# Altium PCB Group9Hat.PcbDoc (part 1 of 2)
Units mm, origin at the board's own origin, x right, y up, seen from the top; angles counter-clockwise.
Board outline 64 x 85 mm, 4 copper layers (Top Side, Ground Plane, Power Plane, Bottom Side), stack 0.844 mm thick; 100 components, 66 nets, 332 pads, 118 vias.
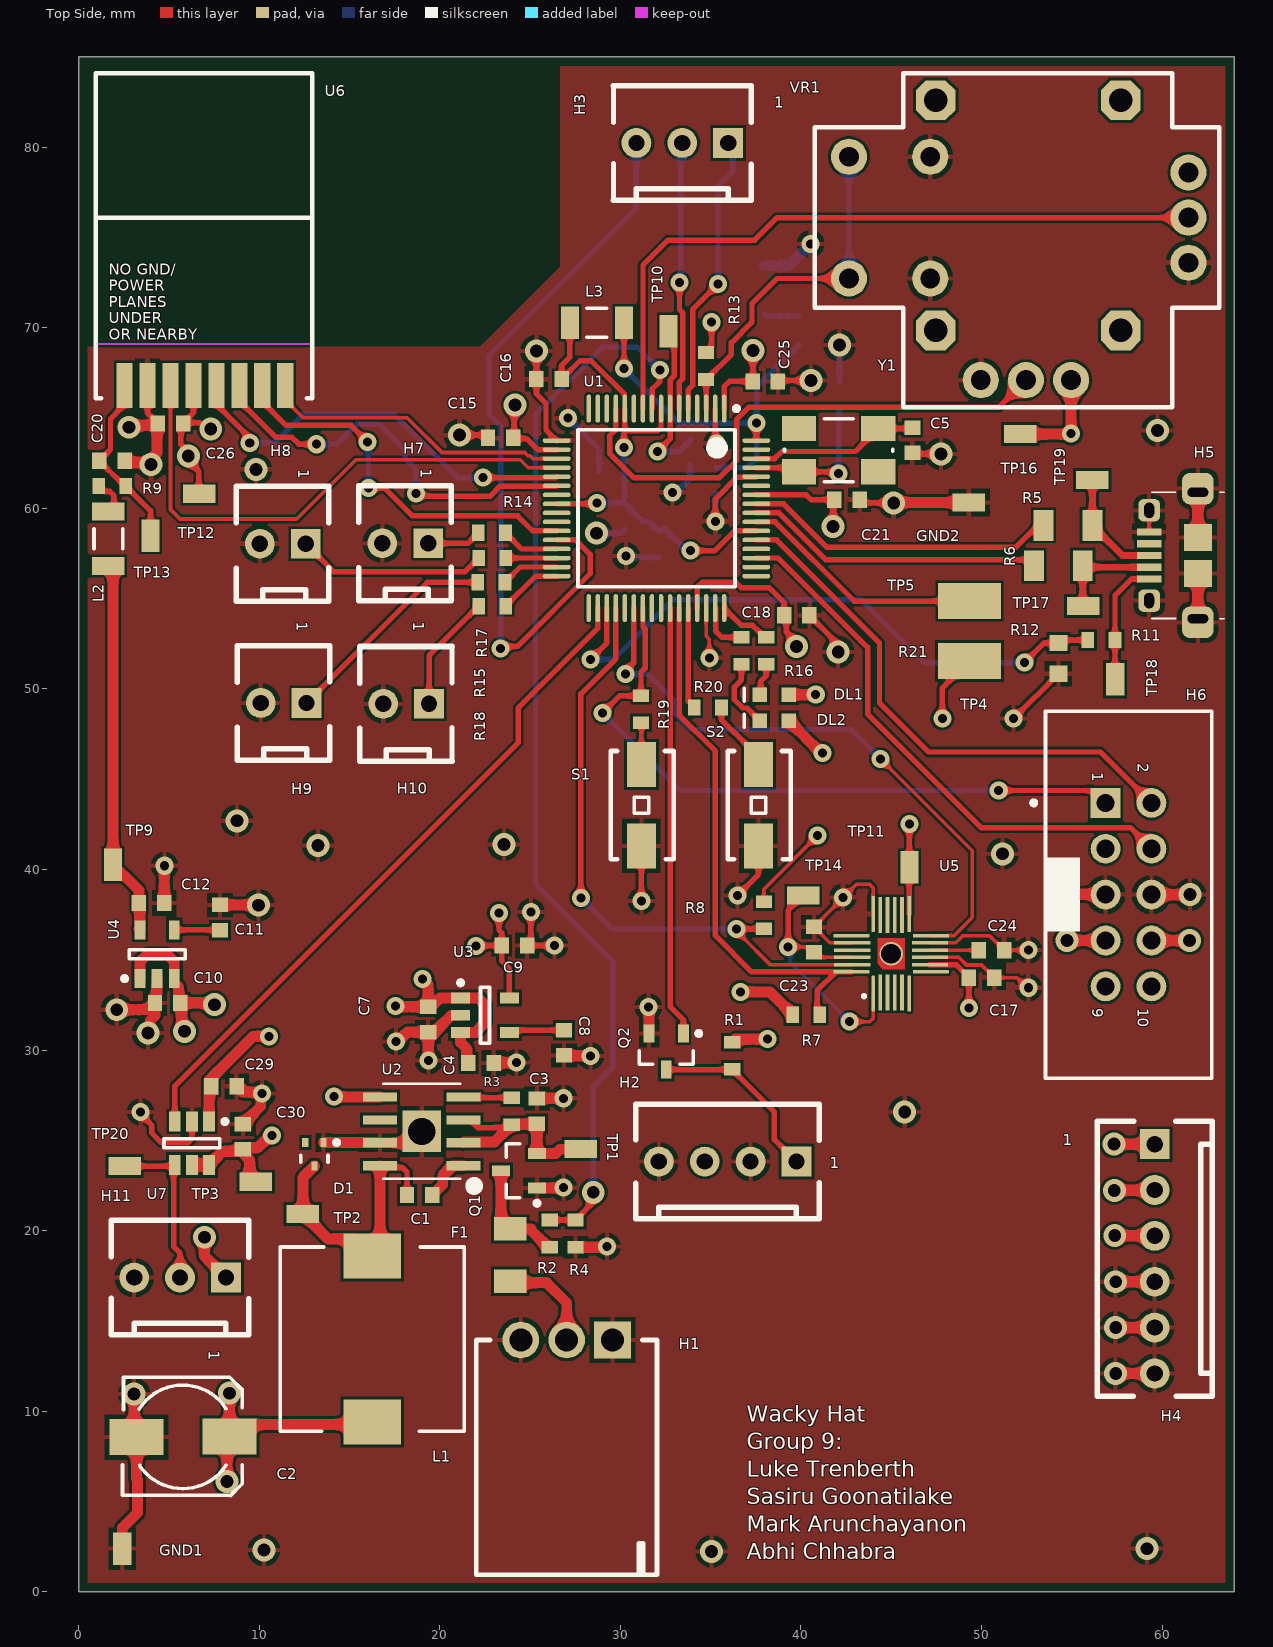
[diagram p0: Top Side view]
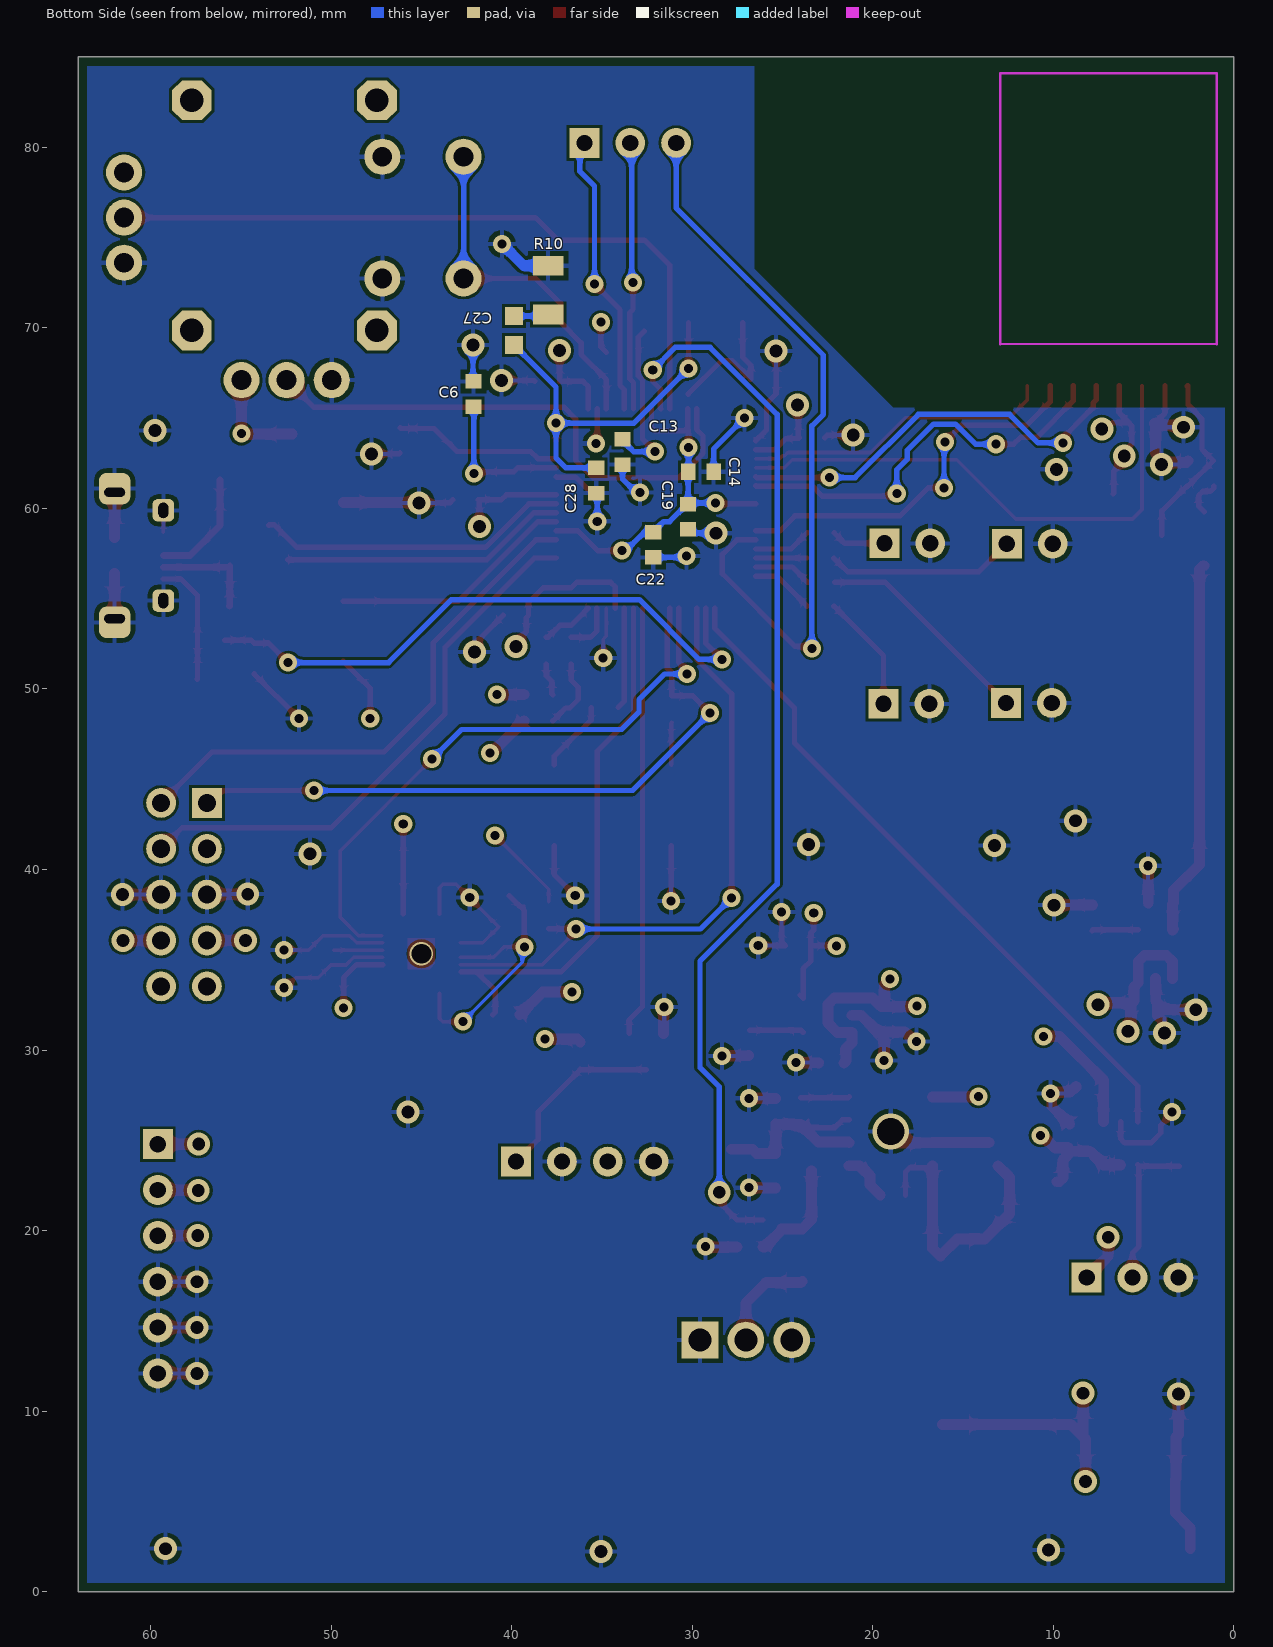
[diagram p1: Bottom Side view, seen from below]
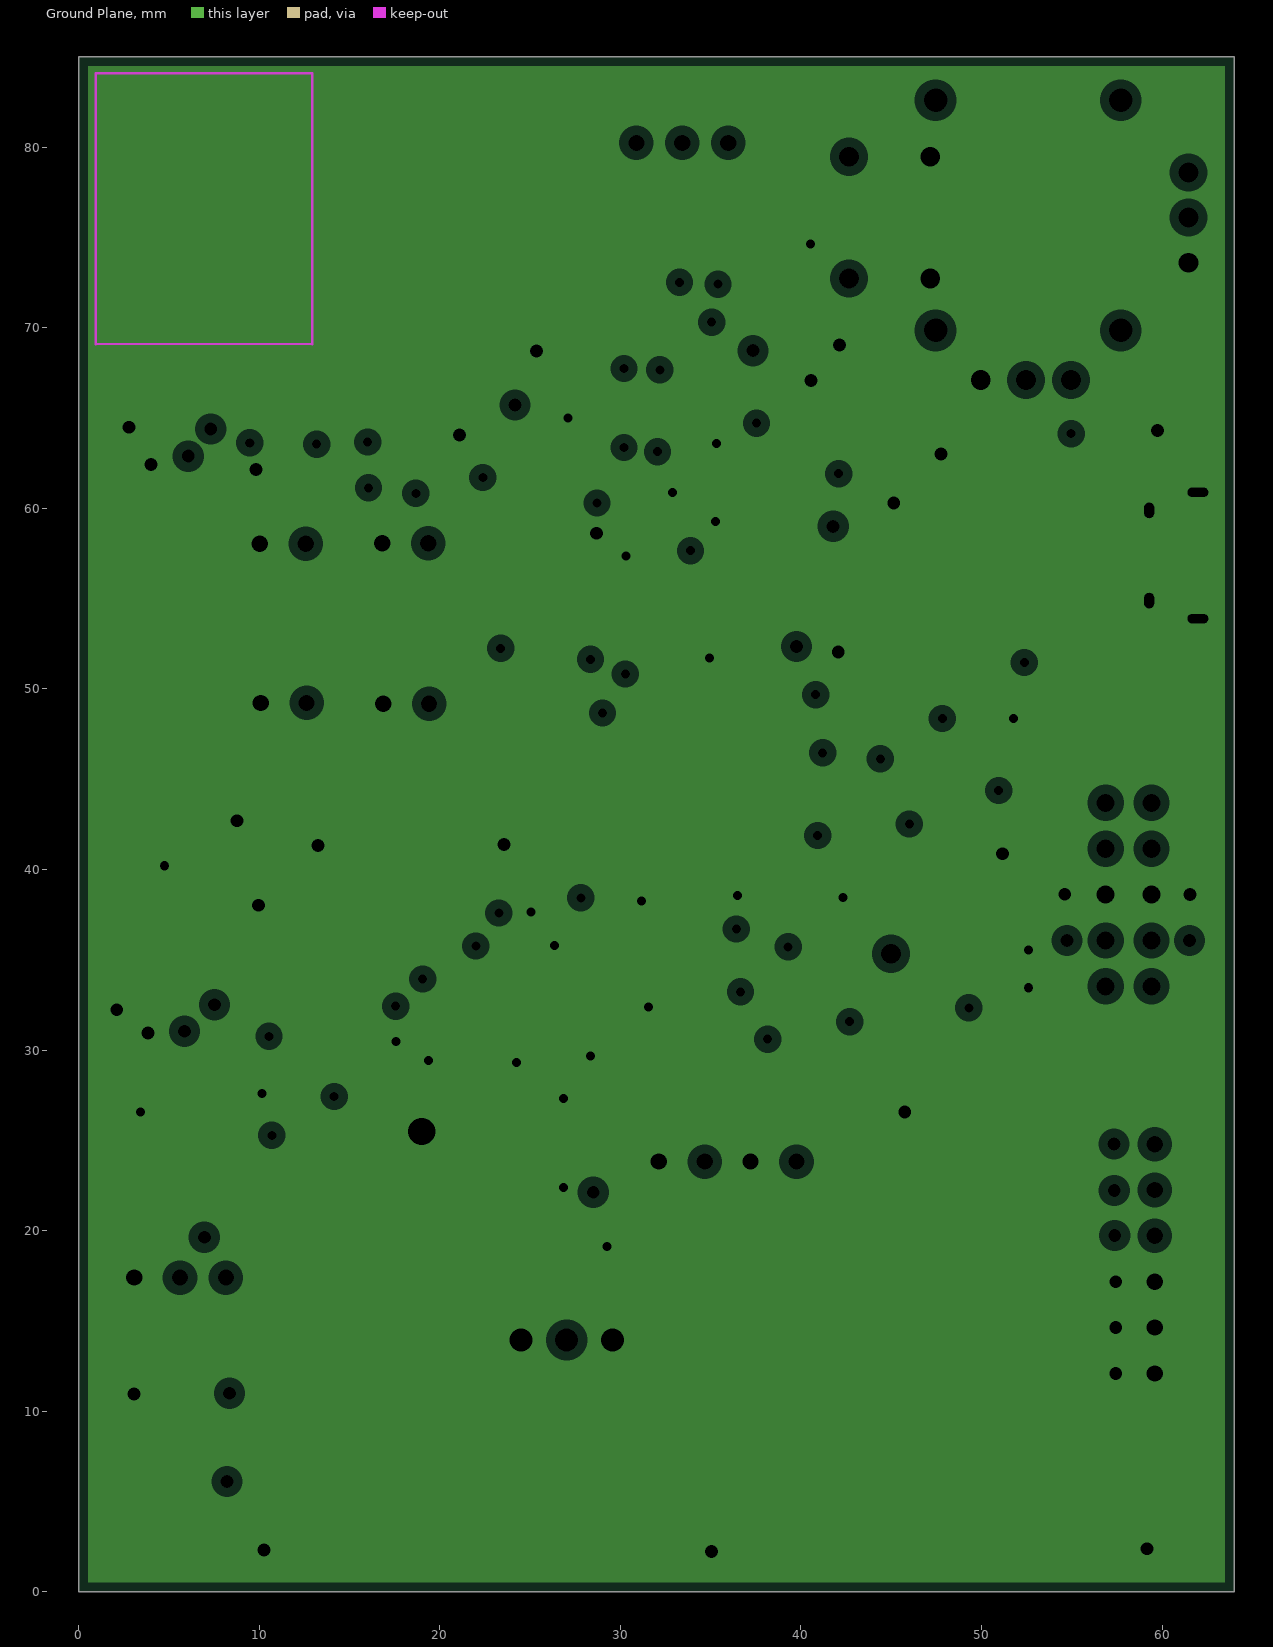
[diagram p2: Ground Plane, clearances drawn from the general rule]
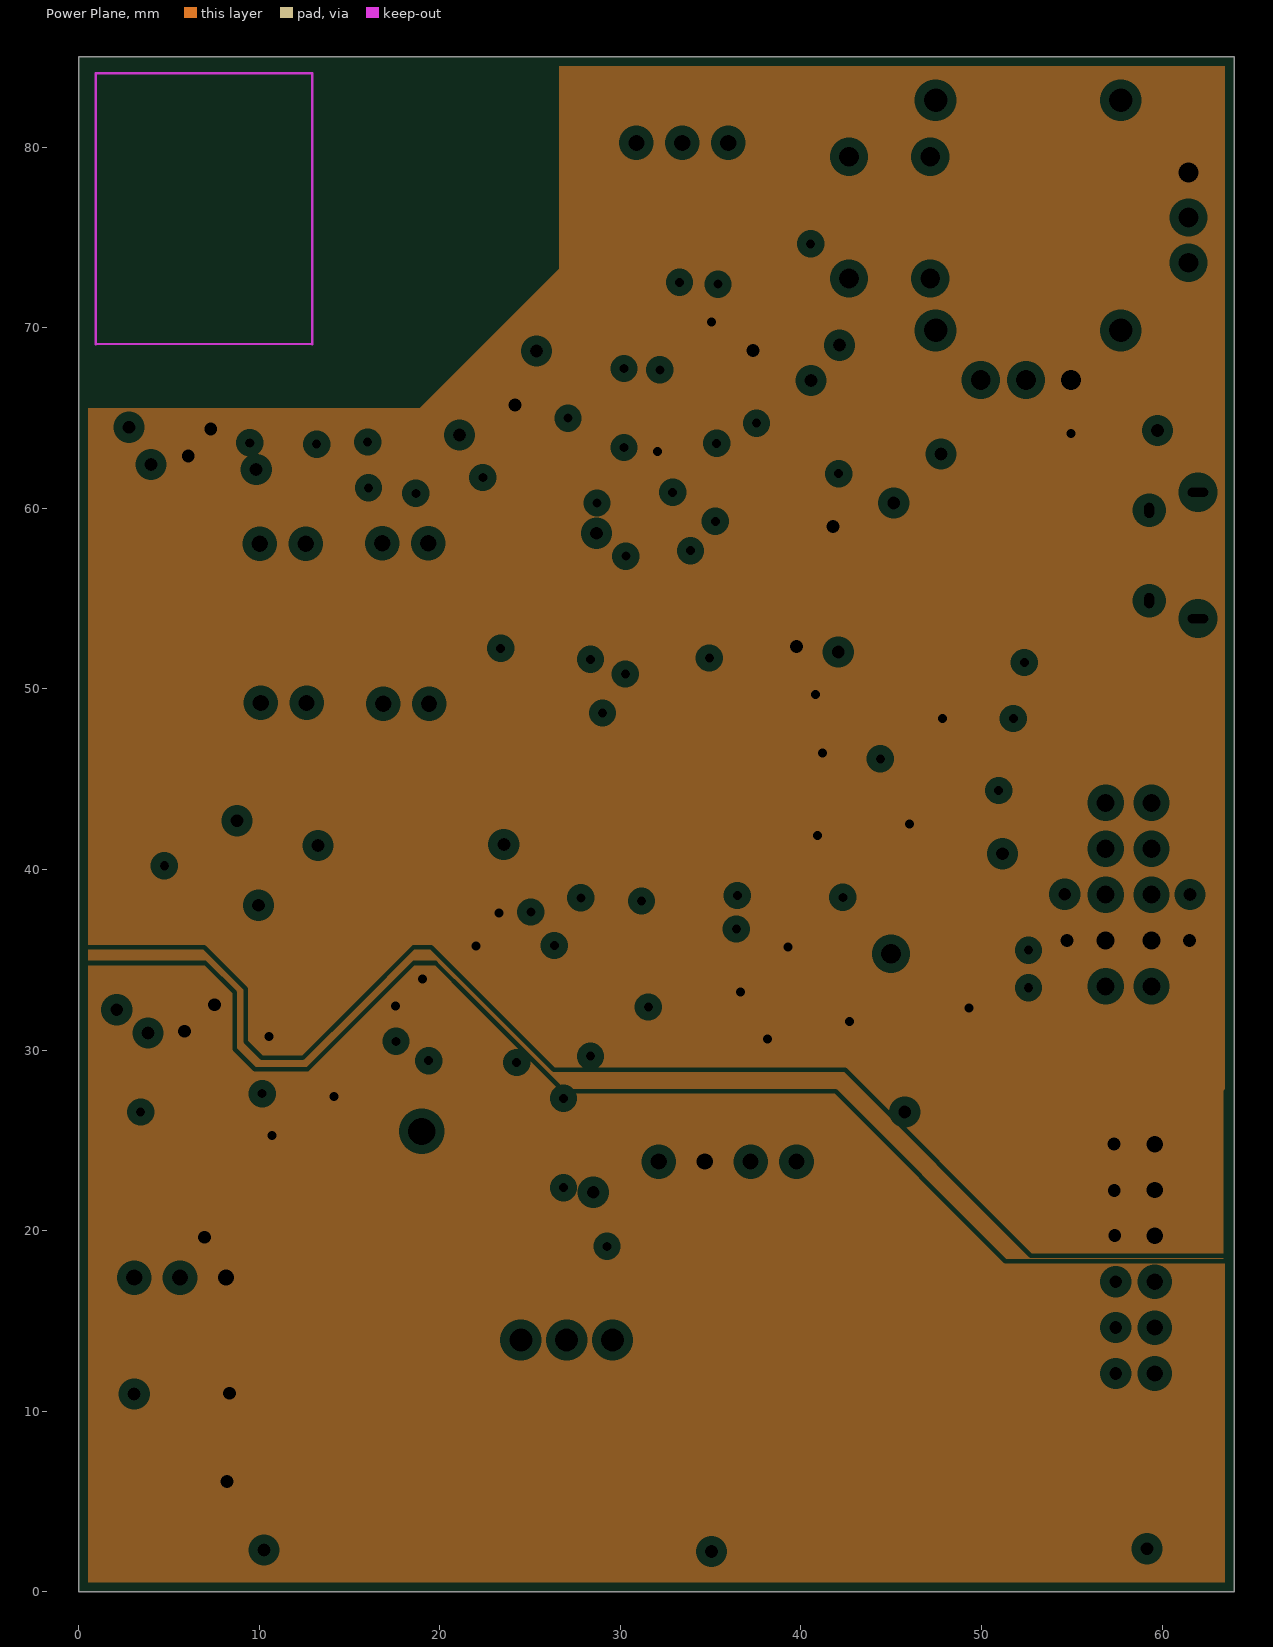
[diagram p3: Power Plane, clearances drawn from the general rule]

## Layer stack, top to bottom
Top Solder: solder mask 0.0102, Solder Resist, Dk 3.5
Top Side: signal copper 0.0356
Dielectric 1: core 0.32, FR-4, Dk 4.8
Ground Plane: plane copper 0.036, net GND
Dielectric 3: prepreg 0.127, Dk 4.2
Power Plane: plane copper 0.036, net (Multiple Nets)
Dielectric 4: core 0.254, Dk 4.2
Bottom Side: signal copper 0.0356
Bottom Solder: solder mask 0.0102, Solder Resist, Dk 3.5

## Board outline
0,85 64,85 64,0 0,0 0,85

## Design rules (kind name [scope] priority, off if disabled: settings)
BoardOutlineClearance [All] p1: gap=0.5 ignorepadtopadclearanceinfootprint=FALSE
Clearance Min_Clearance_Circuit_Labs [All] p1: gap=0.15 ignorepadtopadclearanceinfootprint=FALSE except(0: Arc-Hole Track-Hole SMDPad-Hole THPad-Hole Via-Hole Fill-Hole Poly-Hole Region-Hole Text-Hole)
DiffPairsRouting [All] p1: maxlimit=0.254 minlimit=0.254 mostfreqgap=0.254 toplayer_minwidth=0.381 toplayer_maxwidth=0.381 toplayer_prefwidth=0.381 bottomlayer_minwidth=0.381 bottomlayer_maxwidth=0.381 bottomlayer_prefwidth=0.381 maxuncoupledlength=12.7
FanoutControl Fanout_BGA [IsBGA] p1 off: bgadir=Out bgaviamode=Centered fanoutstyle=Auto fanoutdirection=Alternating viagrid=0.025 // Fanout_BGA (Default Rule)
HoleSize [All] p1: absolutevalues=TRUE maxlimit=10 minlimit=0.3 maxpercent=80.000 minpercent=20.000
MinimumAnnularRing [All] p1: minimumring=0.1
MinimumSolderMaskSliver [All] p1: minsoldermaskwidth=0.1
NetAntennae [All] p1: netantennaetolerance=1
PasteMaskExpansion [All] p1 off: expansion=0.2
PlaneClearance [All] p1: clearance=0.508
PlaneConnect [All] p1: planeconnectstyle=Relief reliefexpansion=0.508 reliefentries=4 reliefconductorwidth=0.254 reliefairgap=0.254
PolygonConnect [All] p1: connectstyle=Relief reliefconductorwidth=0.254 reliefentries=4 polygonreliefangle="90 Angle" airgapwidth=0.254
RoutingVias [All] p1: holewidth=0.5 width=1 viastyle="Through Hole" minholewidth=0.3 minwidth=0.6 maxholewidth=1 maxwidth=2
SMDNeckDown [All] p1 off: percent=50.000
SMDToCorner [All] p1: distance=98425
SMDToPlane [All] p1: distance=1968504
SilkToSolderMaskClearance SilkscreenOverComponentPads [IsPad] p1: minsilkscreentomaskgap=0.254 clearancetoexposedcopper=TRUE
SolderMaskExpansion [All] p1: expansion=0.102
ViasUnderSMD [All] p1: allowed=FALSE
Width [All] p1: maxlimit=2 minlimit=0.15 preferedwidth=0.3
21 further rules are at their usual default settings.

## Classes and differential pairs
differential pair D: +D_P -D_N

## Components (designator, comment, footprint, x,y, rotation, side; value= is the part's Value field where it differs from the comment)
C1 "100nF" CAPC1608L 18.883,21.971 r0 top
C2 "100uF/16V" NICH-1 5.766,8.585 r0 top
C3 "10uF" CAPC1608L 25.375,26.619 r270 top
C4 "100nF" CAPC1608L 22.287,29.286 r180 top
C5 "27pF" CAPC1608L 46.177,63.768 r90 top
C6 "27pF" CAPC1608L 42.113,66.331 r270 bottom
C7 "1uF" CAPC1608L 19.355,31.699 r90 top
C8 "10nF" CAPC1608L 26.873,30.404 r90 top
C9 "1uF" CAPC1608L 24.13,35.789 r180 top
C10 "1uF" CAPC1608L 4.928,32.614 r0 top
C11 "10nF" CAPC1608L 7.823,37.338 r270 top
C12 "1uF" CAPC1608L 4.039,38.151 r180 top
C13 "100nF" CAPC1608L 33.858,63.119 r270 bottom
C14 "100nF" CAPC1608L 29.515,62.027 r0 bottom
C15 "100nF" CAPC1608L 23.368,63.906 r180 top
C16 "100nF" CAPC1608L 26.049,67.158 r0 top
C17 "100nF" CAPC1608L 50.001,34.011 r180 top
C18 "100nF" CAPC1608L 39.765,54.077 r0 top
C19 "100nF" CAPC1608L 30.226,59.538 r90 bottom
C20 "10uF" CAPC1608L 1.84,62.636 r180 top
C21 "100nF" CAPC1608L 42.545,60.477 r0 top
C22 "100nF" CAPC1608L 32.156,57.988 r90 bottom
C23 "10nF" CAPC1608L 40.716,36.119 r270 top
C24 "100nF" CAPC1608L 50.546,35.535 r180 top
C25 "100nF" CAPC1608L 38.024,67.031 r0 top
C26 "10nF" CAPC1608L 5.091,64.694 r0 top
C27 "4.7uF" CAPC1608N 39.878,69.85 r270 bottom
C28 "100nF" CAPC1608L 35.312,61.544 r270 bottom
C29 "100nF" CAPC1608L 8.052,27.991 r0 top
C30 "100nF" CAPC1608L 9.093,25.197 r90 top
D1 "BAS16TT1G" SOT416 13.056,24.232 r180 top
DL1 "Yellow" WL-SMCW0603 37.719,49.682 r0 top
DL2 "Bright Green" WL-SMCW0603 37.719,48.235 r0 top
F1 "5A" RESC3216N 23.901,18.644 r90 top
GND1 "TP_0603" TP_0603 2.413,2.388 r90 top
GND2 "TP_0603" TP_0603 49.301,60.325 r180 top
H1 "Battery_HEADER_3pin" BATT_HEADER_3POS 27.026,13.945 r180 top
H2 "SMD Vert 1.25mm" MOLEX_KK_4_HDR 39.751,23.825 r180 top value="4 Pin Molex KK Hdr"
H3 "3 Pin Molex KK Hdr" MOLEX_KK_3_HDR 35.966,80.239 r180 top
H4 "SMD Vert 1.25mm" MOLEX_KK_6_HDR 59.588,24.79 r270 top value="6 Pin Molex KK Hdr"
H5 "JS_USB_MICRO_B" FCI_USB_10118194-0001LF 63.434,57.389 r90 top
H6 "Header 5X2 Vert" IDC2.54-V10D 58.141,38.608 r270 top
H7 "SMD Vert 1.25mm" MOLEX_KK_2_HDR 19.355,58.064 r180 top value="2 Pin Molex KK HDR"
H8 "SMD Vert 1.25mm" MOLEX_KK_2_HDR 12.573,58.039 r180 top value="2 Pin Molex KK HDR"
H9 "SMD Vert 1.25mm" MOLEX_KK_2_HDR 12.624,49.225 r180 top value="2 Pin Molex KK HDR"
H10 "SMD Vert 1.25mm" MOLEX_KK_2_HDR 19.406,49.174 r180 top value="2 Pin Molex KK HDR"
H11 "SMD Vert 1.25mm" MOLEX_KK_3_HDR 8.153,17.399 r180 top value="3 Pin Molex KK Hdr"
L1 "IND 5.2UH 6A" INDUCTOR5u2 16.256,13.995 r270 top
L2 "1A max, Idc 0.3R," INDC3216L 1.651,58.318 r270 top
L3 "1A max, Idc 0.3R," INDC3216L 28.701,70.282 r180 top
Q1 "SSM3J328R,LF" SOT23_L 24.384,23.317 r180 top
Q2 "SSM3J328R,LF" SOT23_L 32.537,29.921 r270 top
R1 "1K" RESC1608L 36.195,29.693 r90 top
R2 "220K" RESC1608L 26.086,19.837 r270 top
R3 "100K" RESC1608L 23.978,26.619 r270 top
R4 "220K" RESC1608L 27.508,19.837 r90 top
R5 "27R" RESC3216L 54.788,59.055 r180 top
R6 "27R" RESC3216L 54.254,56.82 r180 top
R7 "2K2" RESC1608L 40.298,31.953 r180 top
R8 "2K2" RESC1608L 37.948,37.465 r90 top
R9 "10R" RESC1608L 1.854,61.239 r180 top
R10 "1R" RESC3216L 37.973,72.085 r270 bottom
R11 "27K" RESC1608L 56.642,52.705 r0 top
R12 "47K" RESC1608N 54.254,51.689 r90 top
R13 "10K" RESC1608L 34.747,67.882 r90 top
R14 "680R" RESC1608L 22.885,58.649 r180 top
R15 "680R" RESC1608L 22.911,57.252 r180 top
R16 "680R" RESC1608L 38.075,52.121 r90 top
R17 "680R" RESC1608L 22.86,55.905 r180 top
R18 "680R" RESC1608L 22.897,54.585 r180 top
R19 "680R" RESC1608L 31.14,48.87 r270 top
R20 "680R" RESC1608L 34.849,48.971 r0 top
R21 "680R" RESC1608L 36.703,52.121 r90 top
S1 "EVQPNF05M" EVQPNF05M 31.166,43.561 r270 top
S2 "EVQPNF05M" EVQPNF05M 37.643,43.561 r270 top
TP1 "TP_0603" TP_0603 27.813,24.511 r180 top
TP2 "TP_0603" TP_0603 12.421,20.93 r0 top
TP3 "TP_0603" TP_0603 9.804,22.708 r0 top
TP4 "3V3" TP_1206 49.327,51.537 r180 top value=TP
TP5 "Erase" TP_1206 49.327,54.864 r0 top value=TP
TP9 "TP_0603" TP_0603 1.905,40.259 r270 top
TP10 "TP_0603" TP_0603 32.664,69.799 r270 top
TP11 "TP_0603" TP_0603 45.999,40.132 r270 top
TP12 "TP_0603" TP_0603 6.68,60.808 r180 top
TP13 "TP_0603" TP_0603 3.988,58.496 r270 top
TP14 "TP_0603" TP_0603 40.132,38.557 r180 top
TP16 "TP_0603" TP_0603 52.146,64.11 r180 top
TP17 "TP_0603" TP_0603 55.626,54.585 r0 top
TP18 "TP_0603" TP_0603 57.404,50.546 r270 top
TP19 "TP_0603" TP_0603 56.134,61.57 r0 top
TP20 "TP_0603" TP_0603 2.54,23.571 r0 top
U1 "ATSAM4S8BA-ANR" LQFP64_L 32,60 r270 top locked
U2 "ADP2302ARDZ-5.0 BUCK" RD_8_1 19,25.5 r180 top locked value=Value
U3 "CAT6219-330TDGT3" SOT95P280X145-5N 22.504,31.928 r0 top
U4 "CAT6219-330TDGT3" SOT95P280X145-5N 4.343,35.306 r90 top
U5 "MPU-9250" QUAD24 43.993,33.985 r90 top locked
U6 "nRF24 SMD" NRF24 0.943,66.1 r0 top
U7 "SN74LVC1T45" SOT23-6_N 6.274,24.841 r270 top
VR1 "Joystick 10k with Sw" Joystick_Sw 61.459,76.1 r0 top
Y1 "12MHz" 6.0X3.5-4 42.088,63.221 r0 top

## Footprints (in the part's own frame and the unit in brackets; to place one, negate y for a bottom-side part, rotate by r counter-clockwise, add the part's x,y. Pads: shape width x height; smd on the part's side, far side on the other; paste and mask are expansions set on the pad)
6.0X3.5-4 [mm] "4 SMD 6.0X3.5 mm No Lead Crystal"
  rect 1.9x1.4 smd: 1(-2.2,-1.2) 2(2.2,-1.2) 3(2.2,1.2) 4(-2.2,1.2)
  silkscreen extent -3,-1.75 3,1.75, body extent -3,-1.75 3,1.75, height 1.2
BATT_HEADER_3POS [mil]
  rect 80x80 hole 50: 1(-100,0)
  round 80 hole 50: 2(0,0) 3(100,0)
  silkscreen extent -197,0 197,512
CAPC1608L [mm] "Chip Capacitor, Body 1.6x0.8mm, IPC High Density"
  rect 0.8x0.9 smd: 1(-0.7,0) 2(0.7,0)
  body extent -0.87,-0.48 0.87,0.48, height 0.85
CAPC1608N [mm] "Chip Capacitor, Body 1.6x0.8mm, IPC Medium Density"
  rect 1x1 smd: 1(-0.8,0) 2(0.8,0)
  body extent -0.87,-0.48 0.87,0.48, height 0.85
EVQPNF05M [mm] "Panansonic light touch SMD push button switch"
  rect 2.5x1.6 smd: 1(-2.25,0) 2(2.25,0)
  silkscreen extent -3,-1.7 3,1.8, body extent -3,-1.7 3,1.8, height 5
FCI_USB_10118194-0001LF [mm] "Micro USB B Type Receptacle"
  rect 0.4x1.35 smd mask+0.07: 1(-1.3,4.15) 2(-0.65,4.15) 3(0,4.15) 4(0.65,4.15) 5(1.3,4.15)
  rrect50% 1.75x1.75 hole 0.5 slot 1.15 at 90 deg copper offset -0.2,0 paste+0 mask+0.1: 6(-3.5,1.45)
  rrect50% 1.25x1.2 hole 0.55 slot 0.85 at 0 deg: 6(-2.5,4.15) 6(2.5,4.15)
  rect 1.5x1.55 smd: 6(-1,1.45) 6(1,1.45)
  rrect50% 1.75x1.75 hole 0.5 slot 1.15 at 90 deg copper offset 0.2,0 paste+0 mask+0.1: 6(3.5,1.45)
  silkscreen extent -3.5,0 3.5,4
IDC2.54-V10D [mm] "Connector; IDC, Low Profile Male Header, Thru-Hole; 10 Position; Vertical; Pitch 2.54 mm; Body 20.32 x 9.2 x 9.45 mm (LxWxH)"
  rect 1.65x1.65 hole 1: 1(-5.08,-1.27)
  round 1.65 hole 1: 2(-5.08,1.27) 3(-2.54,-1.27) 4(-2.54,1.27) 5(0,-1.27) 6(0,1.27) 7(2.54,-1.27) 8(2.54,1.27) 9(5.08,-1.27) 10(5.08,1.27)
  silkscreen extent -10.16,-5.37 10.16,4.6, body extent -10.16,-4.6 10.16,4.6, height 9.45
INDC3216L [mm] "Chip Inductor, Body 3.2x1.6mm, IPC High Density"
  rect 1x1.8 smd: 1(-1.5,0) 2(1.5,0)
  silkscreen extent -0.55,-0.8 0.55,0.8, body extent -1.75,-0.95 1.75,0.95, height 1.9
INDUCTOR5u2 [mm]
  rect 2.5x3.2 smd: 1(-4.6,0) 2(4.6,0)
  silkscreen extent -5.1,-5.1 5.1,5.1
Joystick_Sw [mm]
  round 2 hole 1.1: 1(0,2.5) 2(0,0) 3(0,-2.5) 4(-6.5,-9) 5(-9,-9) 6(-11.5,-9) 7(-14.3,-3.37) 8(-18.8,-3.37) 9(-18.8,3.37) 10(-14.3,3.37)
  oct 2.2x2.2 hole 1.3: 11(-14,-6.25) 12(-3.75,-6.25) 13(-14,6.5) 14(-3.75,6.5)
  silkscreen extent -20.7,-10.5 1.7,8
LQFP64_L [mm] "Thin QFP, 64-Leads, Body 10x10mm, Pitch 0.5mm, IPC High Density"
  oval 1.55x0.25 smd mask+0.07: 1(-5.525,3.75) 2(-5.525,3.25) 3(-5.525,2.75) 4(-5.525,2.25) 5(-5.525,1.75) 6(-5.525,1.25) 7(-5.525,0.75) 8(-5.525,0.25) 9(-5.525,-0.25) 10(-5.525,-0.75) 11(-5.525,-1.25) 12(-5.525,-1.75) 13(-5.525,-2.25) 14(-5.525,-2.75) 15(-5.525,-3.25) 16(-5.525,-3.75) 33(5.525,-3.75) 34(5.525,-3.25) 35(5.525,-2.75) 36(5.525,-2.25) 37(5.525,-1.75) 38(5.525,-1.25) 39(5.525,-0.75) 40(5.525,-0.25) 41(5.525,0.25) 42(5.525,0.75) 43(5.525,1.25) 44(5.525,1.75) 45(5.525,2.25) 46(5.525,2.75) 47(5.525,3.25) 48(5.525,3.75)
  oval 0.25x1.55 smd mask+0.07: 17(-3.75,-5.525) 18(-3.25,-5.525) 19(-2.75,-5.525) 20(-2.25,-5.525) 21(-1.75,-5.525) 22(-1.25,-5.525) 23(-0.75,-5.525) 24(-0.25,-5.525) 25(0.25,-5.525) 26(0.75,-5.525) 27(1.25,-5.525) 28(1.75,-5.525) 29(2.25,-5.525) 30(2.75,-5.525) 31(3.25,-5.525) 32(3.75,-5.525) 49(3.75,5.525) 50(3.25,5.525) 51(2.75,5.525) 52(2.25,5.525) 53(1.75,5.525) 54(1.25,5.525) 55(0.75,5.525) 56(0.25,5.525) 57(-0.25,5.525) 58(-0.75,5.525) 59(-1.25,5.525) 60(-1.75,5.525) 61(-2.25,5.525) 62(-2.75,5.525) 63(-3.25,5.525) 64(-3.75,5.525)
  silkscreen extent -5.65,-4.35 4.35,4.55, body extent -5,-5 5,5, height 1.6
MOLEX_KK_2_HDR [mil] "MOLEX_KK_2_HDR"
  rect 65x65 hole 35.43: 1(0,0)
  round 65 hole 35.43: 2(100,0)
  silkscreen extent -50,-125 152,125, body extent -44,-121 146,119, height 630
MOLEX_KK_3_HDR [mil] "MOLEX_KK_3_HDR"
  rect 65x65 hole 35.43: 1(0,0)
  round 65 hole 35.43: 2(100,0) 3(200,0)
  silkscreen extent -50,-125 250,125, body extent -44,-120 244,119, height 630
MOLEX_KK_4_HDR [mil] "MOLEX_KK_4_HDR"
  rect 65x65 hole 35.43: 1(0,0)
  round 65 hole 35.43: 2(100,0) 3(200,0) 4(300,0)
  silkscreen extent -50,-125 350,125, body extent -44,-119 343,119, height 630
MOLEX_KK_6_HDR [mil] "MOLEX_KK_6_HDR"
  rect 65x65 hole 35.43: 1(0,0)
  round 65 hole 35.43: 2(100,0) 3(200,0) 4(300,0) 5(400,0) 6(500,0)
  silkscreen extent -50,-125 550,125, body extent -44,-119 543,119, height 630
NICH-1 [mm] "Electrolytic capacitor"
  rect 3x2 smd: 1(-2.561,-0.022) 2(2.584,0.011)
  silkscreen extent -3.34,-3.25 3.3,3.3, body extent -3.2,-3.2 3.2,3.2, height 5.3
NRF24 [mm]
  rect 0.9x2.5 smd: 1(1.6,0.7) 2(2.871,0.7) 3(4.143,0.7) 4(5.414,0.7) 5(6.686,0.7) 6(7.957,0.7) 7(9.229,0.7) 8(10.5,0.7)
  Keep-Out Layer lines w0.1: 0,3 12,3
  Keep-Out Layer lines w0.15: 0,3 0,18 12,18 12,3
  silkscreen extent 0,0 12,18
QUAD24 [mm]
  oval 2x0.2 smd paste+0.02 mask+0.015: 1(-0.85,0)
  rect 2x0.2 smd paste+0.02 mask+0.015: 2(-0.8,-0.4) 3(-0.8,-0.8) 4(-0.8,-1.2) 5(-0.8,-1.6) 14(3.5,-1.6) 15(3.5,-1.2) 16(3.5,-0.8) 17(3.5,-0.4)
  rrect50% 2x0.2 smd paste+0.02 mask+0.015: 6(-0.85,-2) 13(3.55,-2) 18(3.55,0)
  rrect50% 0.2x2 smd paste+0.02 mask+0.015: 7(0.35,-3.2) 12(2.35,-3.2) 19(2.35,1.2) 24(0.35,1.2)
  rect 0.2x2 smd paste+0.02 mask+0.015: 8(0.75,-3.15) 9(1.15,-3.15) 10(1.55,-3.15) 11(1.95,-3.15) 20(1.95,1.15) 21(1.55,1.15) 22(1.15,1.15) 23(0.75,1.15)
  Top Side region: 0.5,-1.75 0.5,-0.55 0.8,-0.25 2.2,-0.25 2.2,-1.75
  silkscreen extent -1.05,0.45 -0.95,0.55
RD_8_1 [mil]
  rect 74x20 smd paste+0 mask+0: 1(-91,75) 2(-91,25) 3(-91,-25) 4(-91,-75) 5(91,-75) 6(91,-25) 7(91,25) 8(91,75)
  rect 84.65x90 smd paste-44.5 mask+0: EPAD(0,0)
  silkscreen extent -118,-103 84,123, body extent 0,0 10,10, height 10
RESC1608L [mm] "Chip Resistor, Body 1.6x0.8mm, IPC High Density"
  rect 0.7x0.9 smd: 1(-0.75,0) 2(0.75,0)
  body extent -0.85,-0.48 0.85,0.48, height 0.9
RESC1608N [mm] "Chip Resistor, Body 1.6x0.8mm, IPC Medium Density"
  rect 0.9x1 smd: 1(-0.85,0) 2(0.85,0)
  body extent -0.85,-0.48 0.85,0.48, height 0.6
RESC3216L [mm] "Chip Resistor, Body 3.1x1.6mm, IPC High Density"
  rect 1.1x1.7 smd: 1(-1.35,0) 2(1.35,0)
  body extent -1.68,-0.87 1.68,0.87, height 2.54
RESC3216N [mm] "Chip Resistor, Body 3.2x1.6mm, IPC Medium Density"
  rect 1.3x1.8 smd: 1(-1.45,0) 2(1.45,0)
  body extent -1.68,-0.87 1.68,0.87, height 0.71
SOT23-6_N [mm]
  rect 1.1x0.65 smd: 1(-1.2,0.95) 2(-1.2,0) 3(-1.2,-0.95) 4(1.2,-0.95) 5(1.2,0) 6(1.2,0.95)
  silkscreen extent -1.32,-1.55 0.25,1.95, body extent -0.9,-1.55 0.9,1.55, height 1.45
SOT23_L [mm] "SOT23, 3-Leads, Body 2.9x1.3mm, Pitch 0.95mm, Lead Span 2.3mm, IPC High Density"
  rect 1x0.6 smd: 1(-1,0.95) 2(-1,-0.95) 3(1,0)
  silkscreen extent -1.13,-1.5 0.7,1.92, body extent -0.7,-1.5 0.7,1.5, height 1.1
SOT95P280X145-5N [mm] "SOT23, 5-Leads, Body 2.90x2.80mm, Pitch 0.95mm, IPC Medium Density"
  rect 1.05x0.6 smd: 1(-1.35,0.95) 2(-1.35,0) 3(-1.35,-0.95) 4(1.35,-0.95) 5(1.35,0.95)
  silkscreen extent -1.47,-1.55 0.25,1.92, body extent -0.87,-1.52 0.87,1.53, height 1.45
SOT416 [mm] "SOT-416 Leads; Body 1.8 x 1.8 mm, inc. leads (LxW max)"
  rect 0.35x0.5 smd: 1(-0.5,-0.65) 2(0.5,-0.65) 3(0,0.65)
  silkscreen extent -1.35,-0.77 0.75,0.45
TP_0603 [mm] "TestPoint 0603"
  rect 1.8x1 smd: 1(0,0)
  body extent -1,-0.6 1,0.6, height 0.9
TP_1206 [mm] "Test Point Pad"
  rect 3.5x2 smd: 1(0,0)
  body extent -1.62,-0.85 1.63,0.8, height 2
WL-SMCW0603 [mm] "2.4 x 0.8 x 0.7mm LED"
  rect 0.8x0.8 smd: 1(0,0) 2(1.6,0)
  silkscreen extent -0.85,-0.35 -0.85,0.35

## Part data
C1 C4 C13 C14 C15 C16 C17 C18 C19 C21 C22 C24 C25 C28 C29 C30: library part CC_100nF_0603, "CAP CER 100nF X7R +-10% 50V 0603", Code_IPC="1608 [0603]", PackageReference=0603, Storage Location="PCB Assembly WS", Supplier="ECE Dept"
C2: library part CA_100uF_16V, "CAP ALUM 100uF 16V SMD", Manufacturer=Nichcon, Manufacturer PN=UWX1C101MCL1GB, Supplier Part Number 1=1870677, Storage Location="PCB Assembly WS", Supplier="ECE Dept", Supplier 1=Farnell, Supplier 2=Digi-Key, Supplier Part Number 2=493-2105-1-ND
C3 C20: library part CC_10uF_0603, "CAP CER 10UF X5R +-20% 6V3 0603", Voltage - Rated=6.3V, Storage Location="PCB Assembly WS", Supplier="ECE Dept"
C5 C6: library part CC_27pF_0603, "CAP CER 27pF NPO/COG +-5% 50V 0603", Code_IPC="1608 [0603]", PackageReference=0603, Storage Location="PCB Assembly WS", Supplier="ECE Dept"
C7 C9 C10 C12: library part CC_1uF_0603, "CAP CER 1uF Y5V -20% +80% 16V 0603", Max Voltage=16V, Code_IPC="1608 [0603]", PackageReference=0603, Storage Location="PCB Assembly WS", Supplier="ECE Dept"
C8 C11 C23 C26: library part CC_10nF_0603, "CAP CER 10nF X7R +-10% 50V 0603", Code_IPC="1608 [0603]", PackageReference=0603, Storage Location="PCB Assembly WS", Supplier="ECE Dept"
C27: library part CC_4.7uF_0603, "CAP CER 4.7uF X5R +-20%  10V 0603", Max Voltage=10V, Code_IPC=2012[0805], Note="Footprint corresponds to dimensions for bulk cassette packaging. This case size has tightened tolerances.", PackageReference=0805, Storage Location="PCB Assembly WS", Supplier="ECE Dept"
D1: library part DR_BAS16TT1G, "Diode Switching, Vr 75V, 200mA, SOT-416", Average Rectified Current=200mA, Case/Package=SOT-416-3, Forward Voltage=1.25V, Manufacturer="ON Semiconductor", Max Forward Surge Current (Ifsm)=500mA, Max Operating Temperature=150°C, Max Repetitive Reverse Voltage (Vrrm)=75V, Max Reverse Voltage (DC)=100V, Min Operating Temperature=-55°C, Package Quantity=1, Peak Reverse Current=1uA, Power Dissipation=225mW, Supplier Part Number 1=BAS16TT1GOSDKR-ND, ComponentLink1Description=https://datasheet.ciiva.com/8299/bas16tt1-d-8299729.pdf, ComponentLink1URL=https://datasheet.ciiva.com/8299/bas16tt1-d-8299729.pdf, ComponentLink2Description=https://datasheet.ciiva.com/4435/bas16tt1-d-103455-4435027.pdf, ComponentLink2URL=https://datasheet.ciiva.com/4435/bas16tt1-d-103455-4435027.pdf, ComponentLink3Description=https://datasheet.ciiva.com/28646/bas16tt1-d-28646580.pdf, ComponentLink3URL=https://datasheet.ciiva.com/28646/bas16tt1-d-28646580.pdf, ComponentLink4Description=https://datasheet.ciiva.com/16393/bas16tt1-d-16393622.pdf, ComponentLink4URL=https://datasheet.ciiva.com/16393/bas16tt1-d-16393622.pdf, ComponentLink5Description=https://datasheet.ciiva.com/923/bas16tt1-d-923016.pdf, ComponentLink5URL=https://datasheet.ciiva.com/923/bas16tt1-d-923016.pdf, ComponentLink6Description=https://datasheet.ciiva.com/923/bas16tt1-d-923017.pdf, ComponentLink6URL=https://datasheet.ciiva.com/923/bas16tt1-d-923017.pdf, ComponentLink7Description=https://datasheet.ciiva.com/923/bas16tt1-d-923018.pdf, ComponentLink7URL=https://datasheet.ciiva.com/923/bas16tt1-d-923018.pdf, ComponentLink8Description=https://datasheet.ciiva.com/25930/bas16tt1-d-25930986.pdf, ComponentLink8URL=https://datasheet.ciiva.com/25930/bas16tt1-d-25930986.pdf, Contact Plating=Tin,Matte, Current Rating=200mA, Element Configuration=Single, Forward Current=200mA, Halogen Free="Halogen Free", Height=0.9mm, Lead Free="Lead Free", Length=1.65mm, Manufacturer Part Number=BAS16TT1G, Manufacturer PN=BAS16TT1G, Max Surge Current=500mA, Number of Pins=3, Output Current=200mA, Packaging="Tape and Reel", Peak Non-Repetitive Surge Current=500mA, Polarity=Standard, Radiation Hardening=No, REACH SVHC="No SVHC", Recovery Time=6ns, Reverse Recovery Time=6ns, Storage Location="PCB Assembly WS", Supplier="ECE Dept", Supplier 1=Digi-Key, Supplier 2=Farnell, Supplier Part Number 2=2844752, Width=0.9mm
DL1: library part DL_150060YS75000, "LED Yellow 120mcd 0603 SMD", Forward Current If=30, Forward Voltage=2, Manufacturer="WURTH ELEKTRONIK", Manufacturer Part Number=150060YS75000, Supplier Part Number 1=2322074, LED Colour=Yellow, LED Mounting=SMD, Lens Shape=Rectangular, Luminous Intensity=120, Storage Location="PCB Assembly WS", Supplier="ECE Dept", Supplier 1=Farnell, Viewing Angle=140°, Wavelength Typ=590
DL2: library part DL_150060VS75000, "LED Bright Green 40mcd 0603 SMD", Forward Current If=30, Forward Voltage=2, Manufacturer="WURTH ELEKTRONIK", Manufacturer Part Number=150060VS75000, Supplier Part Number 1=2322073, LED Colour="Bright Green", LED Mounting=SMD, Luminous Intensity=40, Storage Location="PCB Assembly WS", Supplier="ECE Dept", Supplier 1=Farnell, Viewing Angle=140°, Wavelength Typ=570
F1: library part FS_Fuse_5.0A, "Fuse 5.0A Fast Acting 1206 SMD", Case/Package=1206, Case Code (Metric)=3216, DC Cold Resistance=19mR, Manufacturer="Bel TRP", Manufacturer Part Number=C1F5, Max Operating Temperature=125°C, Min Operating Temperature=-55°C, Supplier Part Number 1=507-1886-1-ND, Voltage Rating=125V, Voltage Rating (DC)=63V, Approvals=CE,cURus, Case Code (Imperial)=1206, ComponentLink1Description=http://www.farnell.com/datasheets/2571625.pdf, ComponentLink1URL=http://www.farnell.com/datasheets/2571625.pdf, ComponentLink2Description=http://belfuse.com/pdfs/C1F.pdf, ComponentLink2URL=http://belfuse.com/pdfs/C1F.pdf, ComponentLink3Description=http://www.mouser.com/ds/2/643/C1F-594910.pdf, ComponentLink3URL=http://www.mouser.com/ds/2/643/C1F-594910.pdf, ComponentLink4Description=https://belfuse.com/resources/StewartConnector/C1F.pdf, ComponentLink4URL=https://belfuse.com/resources/StewartConnector/C1F.pdf, Contact Plating=Nickel,Tin, Current Rating=5A, Fuse Type="Board Mount (Cartridge Style Excluded)", Length=0.126inch, Mount="Surface Mount", Number of Pins=2, Packaging="Tape and Reel", Pricing 1="1=0.32, 5=0.312, 10=0.298, 50=0.2662, 100=0.2479, 250=0.22032, 500=0.1836, 1000=0.17442 (USD)", Stock 1=725, Supplier 1=Digi-Key, Supplier 2=Element14, Supplier Part Number 2=2848595, Voltage Rating (AC)=125V, Width=0.062inch
GND1 GND2 TP1 TP2 TP3 TP9 TP10 TP11 TP12 TP13 TP14 TP16 TP17 TP18 TP19 TP20: "Test Point 1.65X0.9X1.2mm SMD", Manufacturer="TE Connectivity AMP Connectors", Manufacturer Part Number=1625854-3, Supplier Part Number 1=A106145CT-ND, Mounting Type="Surface Mount", Supplier 1=Digi-Key, Terminal="0.063\" x 0.031\" x 0.045\" (1.60mm x 0.80mm x 1.15mm)", Type="PC Test Point"
H1: "3Pin Header 2.54mm spacing"
H2: library part JA_MOLEX_KK_4POS, "CONN HEADER 4POS 2.54mm VERT_Thru Hole", Manufacturer=Molex, Manufacturer PN=22-23-2041, Supplier Part Number 1=9731164, Storage Location="ECE Dept Store", Supplier="ECE Dept", Supplier 1=Farnell
H3 H11: library part JA_MOLEX_KK_3POS, "CONN HEADER 3POS 2.54mm VERT_Thru Hole", Manufacturer=Molex, Manufacturer PN=22-23-2031, Supplier Part Number 1=9731156, Storage Location="ECE Dept Store", Supplier="ECE Dept", Supplier 1=Farnell
H4: library part JA_MOLEX_KK_6POS, "CONN HEADER 6POS 2.54mm VERT_Thru Hole", Supplier Part Number 1=1462922, Storage Location="ECE Dept Store", Supplier="ECE Dept", Supplier 1=Farnell
H5: library part JS_USB_MICRO_B_SMT, "CONN USB MICRO B RECPT SMT R/A", Manufacturer=FCI, Manufacturer Part Number=10118194-0001LF, Supplier Part Number 1=609-4618-1-ND, Features="Shielded, Solder Retention", Gender=Receptacle, Mounting Type="Surface Mount, Right Angle, Horizontal", Number of Contacts=5, Specifications="USB 2.0", Supplier 1=Digi-Key
H6: library part JA_HDR_IDC_5X2_VERT, "IDC Header, 2,54mm, 10-Pin, Vert", Supplier Part Number 1=1096985, Storage Location="ECE Dept Store", Supplier="ECE Dept", Supplier 1=Farnell
H7 H8 H9 H10: library part JA_MOLEX_KK_2POS, "CONN HEADER 2POS 2.54mm VERT_Thru Hole", Supplier Part Number 1=1462926, Storage Location="ECE Dept Store", Supplier="ECE Dept", Supplier 1=Farnell
L1: library part CDRH104RNP-5R2NC, "FIXED IND 5.2UH 6A 22 MOHM SMD", Current - Saturation=5.6A, DC Resistance (DCR)="22 mOhm Max", Frequency - Self Resonant=-, Manufacturer="Sumida America Components Inc.", Operating Temperature="-40°C ~ 100°C", Package / Case=Nonstandard, Supplier Part Number 1=308-2280-1-ND, Tolerance=±30%, Category="Inductors, Coils, Chokes", ComponentLink1Description=http://products.sumida.com/products/pdf/CDRH104R.pdf, ComponentLink1URL=http://products.sumida.com/products/pdf/CDRH104R.pdf, Height - Seated (Max)="0.157\" (4.00mm)", Manufacturer Part Number=CDRH104RNP-5R2NC, Material - Core=Ferrite, Mounting Type="Surface Mount", Packaging="Cut Tape (CT)", Part Status=Active, Pricing 1="1=2.9, 10=2.678, 100=1.8743, 500=1.5173 (NZD)", Q @ Freq=-, Ratings=-, RoHS="RoHS Compliant", Shielding=Shielded, Size / Dimension="0.402\" L x 0.394\" W (10.20mm x 10.00mm)", Stock 1=3849, Supplier 1=Digi-Key, Supplier Device Package=-, Type=-
L2 L3: library part IN_Ferrite-Bead, "Ferrite Bead, Rdc 0.3R, Z100MHZ 600R, Imax 1A, SMD 1206", DC Current Rating=1, DC Resistance Max=0.08, Ferrite Case Style="1206 ^3216 Metric]", Frequency Range="50MHz to 1", Impedance Tolerance="± 25%", Manufacturer=FAIR-RITE, Manufacturer Part Number=2512066017Y1, Supplier Part Number 1=1612060, Ferrite Mounting=SMD, Impedance=600, Manufacturer PN=2512066017Y1, Storage Location="PCB Assembly WS", Supplier="ECE Dept", Supplier 1=Farnell
Q1 Q2: library part TM_SSM3J328R, "MOSFET P-CH 20V 6A SOT23-3", Case/Package=SOT-23-3, Continuous Drain Current (ID)=6A, Drain to Source Breakdown Voltage=-20V, Drain to Source Resistance=47.4mR, Drain to Source Voltage (Vdss)=20V, Gate to Source Voltage (Vgs)=8V, Input Capacitance=840pF, Input Capacitance (Ciss) @ Vds="840pF @ 10V", Manufacturer=Toshiba, Max Operating Temperature=150°C, Max Power Dissipation=1W, Min Operating Temperature=-55°C, Package / Case="SOT-23-3 Flat Leads", Package Quantity=3000, Power Dissipation=2W, Supplier Device Package=SOT-23F, Supplier Part Number=SSM3J328RLFDKR-ND, ComponentLink1Description=https://datasheet.ciiva.com/11158/ssm3j328r-datasheet-en-20140301-11158652.pdf, ComponentLink1URL=https://datasheet.ciiva.com/11158/ssm3j328r-datasheet-en-20140301-11158652.pdf, Current - Continuous Drain (Id) @ 25° C=6A, Element Configuration=Single, FET Feature="Logic Level Gate, 1.5V Drive", FET Type="MOSFET P-Channel, Metal Oxide", Gate Charge (Qg) @ Vgs="12.8nC @ 4.5V", Manufacturer Part Number=SSM3J328R,LF, Mount="Surface Mount", Number of Channels=1, Number of Elements=1, Number of Pins=3, Packaging="Tape and Reel", Power - Max=1W, Pricing="1=0.79, 10=0.658, 25=0.5772, 100=0.4939, 250=0.42836, 500=0.36284, 1000=0.27972 (NZD)", Radiation Hardening=No, Rds On Max=29.8mR, Storage Location="PCB Assembly WS", Supplier=Digi-Key, Supplier 1=Digi-Key, Supplier Part Number 1=SSM3J328RLFDKR-ND, Turn-Off Delay Time=107ns, Turn-On Delay Time=32ns, Vgs(th) (Max) @ Id="1V @ 1mA"
R1: library part RS_1K, "RES 1.0K OHM 1/10W 5% 0603 SMD", Storage Location="PCB Assembly WS", Supplier="ECE Dept"
R2 R4: library part RS_220K, "RES 3.3K OHM 1/10W 5% 0603 SMD", Storage Location="PCB Assembly WS", Supplier="ECE Dept"
R3: library part RS_100K, "RES 100K OHM 1/10W 5% 0603 SMD", Storage Location="PCB Assembly WS", Supplier="ECE Dept"
R5 R6: library part RT_27R, "RES 27R OHM 1/4W 5% 1206 SMD", Storage Location="PCB Assembly WS", Supplier="ECE Dept"
R7 R8: library part RS_2K2, "RES 2.2K OHM 1/10W 5% 0603 SMD", Storage Location="PCB Assembly WS", Supplier="ECE Dept"
R9: library part RS_10R, "RES 10 OHM 1/10W 5% 0603 SMD", Storage Location="PCB Assembly WS", Supplier="ECE Dept"
R10: library part RT_1R, "RES 1R OHM 1/4W 5% 1206 SMD", Storage Location="PCB Assembly WS", Supplier="ECE Dept"
R11: library part RS_27K, "RES 27K OHM 1/10W 5% 0603 SMD", Storage Location="PCB Assembly WS", Supplier="ECE Dept"
R12: library part RS_47K, "RES 47.0K OHM 1/10W 5% 0603 SMD", Storage Location="PCB Assembly WS", Supplier="ECE Dept"
R13: library part RS_10K, "RES 10.0K OHM 1/10W 5% 0603 SMD", Storage Location="PCB Assembly WS", Supplier="ECE Dept"
R14 R15 R16 R17 R18 R19 R20 R21: library part RS_680R, "RES 680 OHM 1/10W 5% 0603 SMD", Storage Location="PCB Assembly WS", Supplier="ECE Dept"
S1 S2: library part WS_EVQPNF05M, "Panasonic 6 x 3.5mm SMD Light Touch Switch Type SMD", Manufacturer=Panasonic, Supplier Part Number 1=2079481, Manufacturer PN=EVQPNF05M, PackageDescription="6.0 x 3.5 mm", Storage Location="PCB Assembly WS", Supplier="ECE Dept", Supplier 1=Farnell, Supplier 2=Digi-Key, Supplier Part Number 2=P13598SCT-ND
TP4 TP5: library part TP_1206, "Test-Point 3.3x1.6x2.1mm SMD", Manufacturer="Harwin Inc", Manufacturer Part Number=S1751-46R, Supplier Part Number 1=952-1478-2-ND, Mounting Type="Surface Mount", Storage Location=ProtoPlace, Supplier="ECE Dept", Supplier 1=Digi-Key, Supplier 2=Farnell, Supplier Part Number 2=1826282, Type="PC Test Point"
U1: library part SE_ATSAM4S16BA-MU, "IC MCU 32BIT 512KB FLASH 64LQFP", Manufacturer=Atmel, Package / Case=64-LQFP, Supplier Part Number 1=ATSAM4S8BA-ANRCT-ND, Voltage - Supply (Vcc/Vdd)="1.62 V ~ 3.6 V", Code_JEDEC=MO-220VMMD-3, ComponentLink1Description="Manufacturer URL", ComponentLink1URL=http://www.atmel.com/, ComponentLink2Description="SAM4S Series Datasheet", ComponentLink2URL=http://www.atmel.com/dyn/resources/prod_documents/11100.pdf, ComponentLink3Description="SAM4S Series Summary", ComponentLink3URL=http://www.atmel.com/dyn/resources/prod_documents/11100S.pdf, Connectivity="I²C, IrDA, Memory Card, SPI, SSC, UART/USART, USB", Core Processor="ARM® Cortex®-M4", Core Size=32-Bit, Data Converters="A/D 11x12b, D/A 2x12b", Manufacturer Part Number=ATSAM4S8BA-ANR, Number of I/O=47, PackageDescription="64-Pin Quad Flat No-Lead (QFN) Sawn, 9 x 9 x 1.0 mm Body, 0.5 mm Pitch, Exposed Pad", PackageReference=64PS, PackageVersion="revJ, Jul-2007", Packaging="Cut Tape (CT)", Peripherals="Brown-out Detect/Reset, DMA, POR, PWM, WDT", Program Memory Size="512KB (512K x 8)", Program Memory Type=FLASH, RAM Size="128K x 8", Speed=120MHz, Supplier 1=Digi-Key
U2: library part ADP2302ARDZ-5.0-R7, "IC REG BUCK 5V 2A 8SOIC", Current - Output=2A, Frequency - Switching=700kHz, Supplier Part Number 1=ADP2302ARDZ-5.0-R7CT-ND, Voltage - Input (Max)=20V, Voltage - Output (Min/Fixed)=5V, Manufacturer_Part_Number=ADP2302ARDZ-5.0-R7, Output Type=Fixed, Supplier 1=Digi-Key, Type=DEV, Vendor="Analog Devices Inc"
U3 U4: library part SV_CAT6219-330TDGT3, "IC REG LIN 3.3V 500MA TSOT23-5", Base Part Number=CAT6219, Current - Output=500mA, Package / Case="SOT-23-5 Thin, TSOT-23-5", Supplier Device Package=TSOT-23-5, Supplier Part Number=CAT6219-330TDGT3CT-ND, Voltage - Input (Max)=5.5V, Voltage - Output (Min/Fixed)=3.3V, Voltage Dropout (Max)="0.5V @ 500mA", ComponentLink1Description=http://www.onsemi.com/pub/Collateral/CAT6219-D.PDF, ComponentLink1URL=http://www.onsemi.com/pub/Collateral/CAT6219-D.PDF, Manufacturer Part Number=CAT6219-330TDGT3, Supplier=Digi-Key, Supplier 1=Digi-Key
U5: "9 axis IMU"
U6: library part NRF24, "nRF24 SMD Module", Warning="No power planes near or under device"
U7: "1.8V - 5V level converter"
VR1: "JOYSTICK 10K OHM 2 AXIS TH", Manufacturer 1=SparkFun, Manufacturer Part Number 1=COM-09032, Supplier Part Number 1=1568-1526-ND, ComponentLink1Description=https://media.digikey.com/pdf/Data%20Sheets/Sparkfun%20PDFs/COM-09032_Web.pdf?src-supplier=Digi-Key, ComponentLink1URL=https://media.digikey.com/pdf/Data%20Sheets/Sparkfun%20PDFs/COM-09032_Web.pdf?src-supplier=Digi-Key, Pricing 1="1=3.95000 (USD)", RoHS=No, Stock 1=563, Supplier 1=Digi-Key
Y1: library part XT_CRYSTAL_12MHz_18pF, "CRYSTAL 12MHZ 18PF 6X3.5mm SMD", ESR (Equivalent Series Resistance)="60 Ohm", Frequency Stability=±50ppm, Frequency Tolerance=±30ppm, Load Capacitance=18pF, Manufacturer="CTS-Frequency Controls", Manufacturer Part Number=406C35D12M00000, Operating Mode=Fundamental, Operating Temperature="-20°C ~ 70°C", Package / Case="4-SMD, No Lead (DFN, LCC)", Supplier Part Number 1=CTX855CT-ND, Frequency=12MHz, Height="0.047\" (1.20mm)", Mounting Type="Surface Mount", Size / Dimension="0.236\" L x 0.138\" W (6.00mm x 3.50mm)", Supplier 1=Digi-Key

## Via types
v1: diameter 1, hole 0.5, Top Side to Bottom Side, 70 vias
v2: diameter 1.27, hole 0.711, Top Side to Bottom Side, 46 vias
v3: diameter 1.3, hole 1.1, Top Side to Bottom Side, 1 vias
v4: diameter 2, hole 1.5, Top Side to Bottom Side, 1 vias

## Nets (pads, with @x,y where several pads share a name; then routed paths per layer and width w, separated by ;. In a path a pad name is that pad's centre, name@x,y a point inside that pad or via, vN(x,y) a via of type N, cw(c..) or ccw(c..) an arc to the next point about the centre after c; other vN are vias at no path point)
3V3: C9.2 C13.1 C15.1 C17.2 C18.1 C21.1 C23.2 C25.1 C26.2 C29.1 DL1.2 DL2.2 H4.1 H4.2 H4.3 H6.7 H6.8 R1.2 R7.2 R8.2 R13.2 TP4.1 TP10.1 TP11.1 TP12.1 TP14.1 TP16.1 U1.1 U1.7 U1.18 U1.45 U1.58 U3.5 U5.1 U5.8 U5.13 U5.22 U6.4 U7.1 VR1.1 VR1.4 | length 116.5
  Top Side w0.2: R8.2 37.948,38.913 v1(40.919,41.885) ; v1(39.294,35.712) 40.423,35.712 C23.2 41,35.135 U5.22 ; v1(42.697,31.572) 43.815,31.572 43.993,31.75 U5.1
  Top Side w0.3: U6.4 6.357,65.3 5.791,64.734 C26.2 ; TP12.1 6.655,60.833 6.655,62.044 6.071,62.628 v2(6.071,62.89) 6.071,63.153 5.664,63.559 5.664,64.567 C26.2 ; v2(7.315,64.389) 7.053,64.389 6.697,64.745 5.842,64.745 C26.2 ; v1@21.933,36.068 v1@21.996,36.068 ; v1(21.996,35.763) 22.022,35.789 C9.2 ; v1(23.266,37.592) 23.277,37.582 23.277,36.642 23.43,36.489 C9.2 ; U3.5@24.004,33.028 U3.5 23.854,34.515 23.43,34.939 C9.2 ; C15.1 24.118,63.956 24.118,65.672 v2(24.168,65.723) ; C15.1@24.105,63.87 24.802,63.87 25.421,63.25 U1.18 ; v1(32.055,63.144) 32.75,63.84 U1.7 32.75,67.102 32.982,67.334 32.982,69.482 TP10.1 ; U1.45 34.25,55.637 34.519,55.905 36.398,55.905 36.703,55.601 38.252,55.601 39.065,54.788 C18.1 39.186,53.956 39.186,53.177 39.751,52.612 v2(39.751,52.349) ; R13.2 35.052,68.937 v1(35.052,70.307) ; U1.1 35.75,66.738 36.043,67.031 C25.1 37.338,67.045 v2(37.338,68.732) ; U1.58 40.291,60.75 40.564,60.477 C21.1 41.783,60.415 v2(41.783,59.004) ; v1(39.294,35.712) 39.294,37.719 TP14.1 ; U5.13 45.993,40.125 TP11.1 v1(45.999,42.52) ; U5.8 48.577,34.735 C17.2 v1(49.301,32.334) ; v1(47.828,48.362) 47.828,50.038 TP4.1
  Top Side w0.6: U7.1 7.217,26.048 7.217,27.552 7.211,27.559 7.211,28.318 9.652,30.759 v1(10.541,30.759) ; R1.2 36.359,30.607 v1(38.151,30.607) ; v1(36.652,33.223) 38.278,33.223 R7.2 ; DL2.2 41.097,46.457 v1(41.199,46.457) ; DL1.2 v1(40.818,49.682) ; TP16.1 54.933,64.11 54.962,64.138 54.962,67.097 VR1.4 ; v2(54.737,36.068) H6.7 ; v2(57.328,24.79) H4.1 ; v2(57.353,22.225) 57.366,22.238 59.576,22.238 H4.2 ; v2(57.379,19.736) 57.391,19.723 59.576,19.723 H4.3 ; H6.8 v2(61.519,36.068)
  Bottom Side w0.2: v1(39.294,35.712) 39.407,35.599 39.407,34.862 v1(42.697,31.572)
  Bottom Side w0.3: v1(32.055,63.144) 33.249,63.144 33.858,63.754 C13.1
  other v1: 54.966,64.135
3V3RF: C12.2 L2.2 TP9.1 U4.5 | length 21
  Top Side w0.6: L2.2 1.705,56.818 1.905,56.618 TP9.1 2.582,39.582 2.607,39.582 3.339,38.851 C12.2 3.393,38.096 U4.5 U4.5@3.339,36.711
5V: C2.2 C4.2 C7.2 C10.2 C30.1 H2.3 H11.1 L1.2 TP3.1 U2.5 U3.1 U3.3 U4.1 U4.3 U7.5 U7.6 | length 45.6
  Top Side w0.6: U4.1 3.393,34.904 3.745,35.255 4.942,35.255 5.293,34.904 U4.3 5.293,33.731 5.528,33.497 5.528,32.714 C10.2 ; v2(5.867,31.039) 5.867,31.22 5.702,31.385 5.702,32.539 C10.2 ; U7.5 U7.6 7.979,24.397 8.993,24.397 9.47,23.92 9.47,22.908 9.67,22.708 TP3.1 ; v2(6.96,19.634) 6.96,18.593 H11.1 ; v2@7.417,32.614 C10.2 ; v2(8.213,6.105) 8.213,8.46 C2.2 ; v2(8.357,10.998) 8.349,10.991 C2.2 ; C30.1 9.193,24.597 9.934,24.597 10.611,25.273 v1(10.701,25.273) ; v1(14.148,27.432) 14.175,27.405 U2.5 ; L1.2@16.129,9.268 9.021,9.268 C2.2 ; v1(17.551,32.436) 17.588,32.399 C7.2 19.355,33.63 v1(19.05,33.934) ; C7.2@19.533,32.399 20.011,32.878 U3.1 22.128,32.878 22.479,32.526 22.479,31.496 21.961,30.978 U3.3 21.154,30.428 21.487,30.095 21.487,29.386 C4.2
  other v2: 7.518,32.512
BMV: R2.1 R4.2 U1.9 | length 59.9
  Top Side w0.3: R2.1 R4.2 28.499,21.578 v2(28.499,22.123) ; U1.9 31.775,65.55 31.775,66.624 32.182,67.031 v1(32.182,67.666)
  Bottom Side w0.3: v2(28.499,22.123) 28.499,27.964 29.566,29.031 29.566,34.925 25.298,39.192 25.298,65.202 29.007,68.91 30.937,68.91 v1(32.182,67.666)
Channel0: R14.1 U1.29 | length 3.2
  Top Side w0.3: R14.1 24.534,57.75 U1.29
Channel1: R15.1 U1.30 | length 2.8
  Top Side w0.3: R15.1 26.473,57.252 U1.30
Channel2: R17.1 U1.31 | length 3.2
  Top Side w0.3: R17.1 24.455,56.75 U1.31
Channel3: R18.1 U1.32 | length 3.5
  Top Side w0.3: R18.1 25.313,56.25 U1.32
D_N: H5.2 R6.1 TP17.1 | length 6
  Top Side w0.381: TP17.1 55.604,54.606 R6.1 55.685,56.739 H5.2
D_P: H5.3 R5.1 TP19.1 | length 6.4
  Top Side w0.381: TP19.1 56.138,61.566 R5.1 57.803,57.389 H5.3
GND: C2.1 C3.1 C4.1 C5.1 C6.1 C7.1 C8.1 C9.1 C10.1 C11.1 C12.1 C13.2 C14.1 C15.2 C16.1 C17.1 C18.2 C19.1 C20.1 C21.2 C22.1 C23.1 C24.1 C25.2 C26.1 C28.2 C29.2 C30.2 D1.1 GND1.1 GND2.1 H1.1 H1.3 H2.2 H2.4 H4.4 H4.5 H4.6 H5.5 H5.6 H6.5 H6.6 H7.2 H8.2 H9.2 H10.2 H11.3 Q1.1 Q2.2 R4.1 R10.1 R12.1 S1.2 S2.2 U1.2 U1.17 U1.46 U1.60 U2.7 U2.EPAD U3.2 U4.2 U5.9 U5.11 U5.18 U5.20 U6.2 U7.2 VR1.3 VR1.6 VR1.7 VR1.10 | length 150.4
  Top Side w0.2: U1.46 34.75,52.934 34.925,52.759 v1(34.925,51.714) ; U5.20 41.6,35.935 C23.1 43.09,39.192 43.79,39.192 43.993,38.989 U5.18 ; U5.9 48.742,35.135 49.167,34.711 50.001,34.711 C17.1 51.96,34.011 52.519,33.452 v1(52.603,33.452) ; U5.11@47.143,35.941 48.577,35.941 48.958,36.322 50.459,36.322 C24.1 v1(52.603,35.535) ; H5.5 H5.6@59.284,59.889
  Top Side w0.3: v1(3.429,26.568) 3.429,26.451 4.042,25.838 4.042,25.422 4.597,24.867 6.045,24.867 6.274,25.095 U7.2 ; U6.2 3.814,65.271 C26.1 ; v2(21.082,64.059) 22.516,64.059 C15.2 ; v1(25.044,37.643) 25.044,36.003 C9.1 v1(26.34,35.789) ; v2(25.349,68.707) C16.1 25.349,66.345 25.883,65.811 25.883,64.342 U1.17 ; v1(31.166,38.252) S1.2 ; U1.2 35.25,63.683 v1(35.331,63.602) ; v1(35.255,59.284) 35.255,60.519 36.461,61.725 37.5,61.725 U1.60 ; v1(36.474,38.557) 37.643,39.726 S2.2 ; C25.2 38.775,67.081 v2(40.564,67.081) ; C18.2 42.062,52.479 v2(42.062,52.045) ; C21.2 43.423,60.3 v2(45.136,60.3) ; C5.1 46.228,63.017 v2(47.752,63.017) ; v1(51.765,48.362) 51.777,48.362 R12.1
  Top Side w0.6: v2(2.108,32.233) 3.847,32.233 C10.1 ; GND1.1 2.413,3.538 3.251,4.376 3.251,6.223 3.205,6.27 C2.1 3.073,8.694 v2(3.073,10.947) ; C20.1 2.54,62.635 2.64,62.535 3.912,62.535 v2(4.013,62.433) 4.141,62.561 4.141,62.866 4.336,63.061 C26.1@4.336,64.637 ; v2(2.794,64.491) 2.896,64.592 4.291,64.592 C26.1@4.336,64.637 ; v2(3.835,30.937) 3.964,31.065 3.964,31.65 4.228,31.914 C10.1 ; U4.2 4.343,33.731 4.328,33.715 4.328,32.714 C10.1 ; C26.1 4.391,64.692 C26.1@4.336,64.637 ; C12.1 4.739,40.197 v1(4.75,40.208) ; C11.1 9.943,38.038 v2(9.957,38.024) ; C29.2 8.752,27.941 8.852,27.841 8.902,27.841 9.082,27.661 10.083,27.661 v1(10.16,27.584) ; C30.2 10.083,26.887 v1@10.083,27.508 ; D1.1 16.672,24.882 U2.7 18.365,24.865 v4(19,25.5) ; v1(17.577,30.48) 17.685,30.48 18.204,30.999 C7.1 19.406,30.948 19.368,30.91 19.368,29.426 v1(19.38,29.413) ; C7.1@19.533,30.999 19.624,30.908 20.643,31.928 U3.2 ; C4.1 23,29.299 24.244,29.299 v1(24.257,29.312) ; C3.1 25.38,27.325 26.842,27.325 v1(26.848,27.33) ; Q1.1 26.838,22.367 v1(26.848,22.377) ; C8.1 26.891,29.685 28.328,29.685 v1(28.346,29.667) ; R4.1 29.222,19.087 v1(29.261,19.126) ; v1(31.547,32.385) 31.587,32.344 Q2.2 ; v2(45.136,60.3) 45.161,60.325 GND2.1 ; v2(54.61,38.633) 54.623,38.621 56.858,38.621 H6.5 ; v2(57.429,12.09) H4.6 ; v2(57.429,14.63) H4.5 ; v2(57.429,17.17) H4.4 ; H6.6 v2(61.544,38.608) ; H5.6@61.984,53.889 H5.6@61.984,56.389 ; H5.6@61.984,58.389 H5.6@61.984,60.889
  Bottom Side w0.3: v1(27.102,64.999) 28.815,63.286 C14.1 ; v2(28.677,58.623) 30.012,58.623 C19.1 ; v1(30.302,57.353) 30.367,57.288 C22.1 ; v1(32.893,60.884) 33.122,60.884 33.858,61.62 C13.2 ; v1(35.255,59.284) 35.255,60.787 C28.2 ; C6.1 42.139,67.056 v2(42.139,69.037)
  Bottom Side w0.6: R10.1 39.323,73.435 v1(40.538,74.651)
  other v1: 42.316,38.456
  other v2: 35.052,2.235 10.262,2.311 59.157,2.388 45.745,26.568 51.156,40.869 13.259,41.326 23.546,41.377 8.763,42.697 9.83,62.154 59.741,64.313
INT: U1.38 U5.12 | length 33.9
  Top Side w0.2: v1(44.399,46.126) 49.479,41.046 49.479,37.338 48.476,36.335 U5.12
  Top Side w0.3: v1(30.277,50.825) 30.277,51.015 30.75,51.488 U1.38
  Bottom Side w0.3: v1(30.277,50.825) 31.521,50.825 32.944,49.403 32.944,48.717 33.909,47.752 42.774,47.752 v1(44.399,46.126)
IRQ: U1.19 U6.8 | length 17.2
  Top Side w0.2: U6.8 11.443,66.002 12.421,65.024 18.186,65.024 20.117,63.094 24.689,63.094 24.867,62.916 24.994,62.916 25.159,62.75 U1.19
LED: U1.34 U7.3 | length 38.1
  Top Side w0.3: U7.3 5.324,28.006 24.333,47.015 24.333,48.946 28.75,53.363 U1.34
MISO: U1.27 U6.7 | length 21.6
  Top Side w0.3: U6.7 10.171,65.902 11.481,64.592 15.088,64.592 v1(16.002,63.678) ; v1(16.053,61.138) 16.929,61.138 18.479,59.588 24.308,59.588 25.146,58.75 U1.27
  Bottom Side w0.3: v1(16.002,63.678) 16.053,63.627 v1(16.053,61.138)
MOSI: U1.22 U6.6 | length 22.8
  Top Side w0.3: U6.6 8.9,65.947 10.915,63.932 11.811,63.932 12.192,63.551 v1(13.183,63.551) ; v1(18.669,60.833) 18.821,60.681 22.798,60.681 23.343,61.225 26.45,61.225 U1.22
  Bottom Side w0.3: v1(13.183,63.551) 14.3,63.551 15.418,64.668 16.637,64.668 18.085,63.22 18.085,62.726 18.669,62.142 v1(18.669,60.833)
NetC1_1: C1.1 D1.3 L1.1 TP2.1 U2.8 | length 15.8
  Top Side w0.3: U2.8 16.793,23.491 17.936,23.491 18.183,23.244 C1.1
  Top Side w0.6: D1.3 12.421,22.947 TP2.1 13.805,19.545 15.306,19.545 L1.1 16.689,19.028 U2.8
NetC1_2: C1.2 U2.1 | length 2.7
  Top Side w0.6: C1.2 20.16,22.548 20.16,23.038 20.718,23.595 U2.1
NetC3_2: C3.2 Q1.2 R3.2 TP1.1 U2.2 U2.3 | length 11.6
  Top Side w0.3: U2.3 21.68,26.135 22.11,25.705 23.813,25.705 R3.2
  Top Side w0.6: U2.2 21.357,24.911 23.019,24.911 R3.2 24.003,25.894 25.35,25.894 C3.2 25.375,24.267 Q1.2 26.419,24.267 26.663,24.511 TP1.1
NetC5_2: C5.2 U1.62 Y1.3 | length 9.4
  Top Side w0.3: U1.62 38.543,62.75 38.94,63.147 43.014,63.147 Y1.3 46.13,64.421 C5.2
NetC6_2: C6.2 U1.61 Y1.1 | length 8.3
  Top Side w0.3: U1.61 39.658,62.25 Y1.1 41.98,62.021 v1@42.037,62.078
  Bottom Side w0.3: v1(42.088,61.925) 42.088,65.405 C6.2@42.254,65.571
NetC8_2: C8.2 U3.4 | length 3
  Top Side w0.3: U3.4 23.977,31.101 C8.2@26.649,31.101 ; C8.2@26.699,31.101 C8.2@26.822,31.101
NetC11_2: C11.2 U4.4 | length 2.6
  Top Side w0.3: U4.4 C11.2@7.823,36.656 ; C11.2 C11.2@7.845,36.617
NetC14_2: C14.2 C16.2 C19.2 C22.2 L3.2 U1.8 U1.12 U1.24 U1.54 | length 29.2
  Top Side w0.3: U1.24 28.652,60.25 v1(28.702,60.3) ; L3.2 27.201,68.372 26.749,67.92 C16.2 27.765,68.174 28.372,68.174 30.225,66.32 ; v1(30.201,63.373) 30.201,64.362 30.236,64.397 30.289,64.451 30.435,64.305 32.065,64.305 32.25,64.49 U1.8 ; 30.25,64.49 U1.12 ; v1(33.884,57.658) 35.23,57.658 36.322,58.75 U1.54
  Bottom Side w0.3: v1(28.702,60.3) 30.164,60.3 C19.2@30.189,60.274 ; v1(30.201,63.373) 30.201,62.041 C14.2 30.226,62.016 C19.2 30.276,60.238 31.249,59.265 31.58,59.265 C22.2 32.396,58.928 33.666,57.658 v1(33.884,57.658)
NetC20_2: C20.2 R9.1 TP13.1 U6.1 | length 10.1
  Top Side w0.3: U6.1@2.554,66.8 U6.1@2.554,66.789 ; R9.1@2.571,61.206 C20.2 1.764,63.26 1.764,64.959 2.543,65.738 U6.1 U6.1@2.554,66.789 ; U6.1@2.58,66.763 U6.1@2.554,66.789 ; R9.1 3.988,59.856 3.988,59.385 TP13.1
NetC24_2: C24.2 U5.10 | length 2.7
  Top Side w0.2: U5.10 C24.2
NetC27_1: C27.1 R10.2 | length 1.9
  Bottom Side w0.3: R10.2 38.058,70.65 C27.1
NetC27_2: C27.2 C28.1 L3.1 U1.64 | length 21.8
  Top Side w0.3: v1(30.201,67.742) L3.1 ; U1.64 37.525,64.703 v1(37.541,64.719)
  Bottom Side w0.3: v1(30.201,67.742) 33.223,64.719 v1(37.541,64.719) ; C28.1 36.997,62.244 37.541,62.789 v1(37.541,64.719) ; C27.2 37.541,66.713 v1(37.541,64.719)
NetDL1_1: DL1.1 R16.1 | length 1.8
  Top Side w0.3: DL1.1 37.77,49.733 37.77,50.419 38.075,50.724 R16.1
NetDL2_1: DL2.1 R21.1 | length 4
  Top Side w0.3: R21.1 36.703,50.495 36.297,50.089 36.297,49.428 36.779,48.946 37.008,48.946 DL2.1
NetF1_1: F1.1 H1.2 | length 5.7
  Top Side w0.6: F1.1 23.975,17.12 25.908,17.12 27.026,16.002 H1.2
NetF1_2: F1.2 Q1.3 R2.2 | length 6.1
  Top Side w0.6: Q1.3 23.384,20.611 F1.2 25.051,20.094 25.051,20.022 25.986,19.087 R2.2
NetH2_1: H2.1 Q2.3 R1.1 | length 10.2
  Top Side w0.3: Q2.3 R1.1@36.174,28.921 ; R1.1 R1.1@36.174,28.921 ; H2.1 38.532,25.044 38.532,26.563 R1.1@36.174,28.921
NetH7_1: H7.1 R14.2 | length 3
  Top Side w0.3: H7.1 21.551,58.064 R14.2
NetH8_1: H8.1 R15.2 | length 10.5
  Top Side w0.3: H8.1 14.122,56.49 21.399,56.49 R15.2
NetH9_1: H9.1 R17.2 | length 12.3
  Top Side w0.3: H9.1 19.304,55.905 R17.2
NetH10_1: H10.1 R18.2 | length 6.5
  Top Side w0.3: H10.1 19.406,51.843 R18.2
NetH11_2: H11.2 TP20.1 U7.4 | length 8.6
  Top Side w0.3: TP20.1@3.027,23.575 U7.4@5.258,23.575 ; U7.4 U7.4@5.258,23.575 ; H11.2 5.613,18.771 5.258,19.126 U7.4@5.258,23.575
NetL2_1: L2.1 R9.2 | length 2.1
  Top Side w0.3: R9.2 1.104,61.139 1.304,60.939 1.721,60.939 1.954,60.706 1.954,60.122 L2.1
NetR3_1: R3.1 U2.4 | length 2.7
  Top Side w0.3: U2.4 21.347,27.369 R3.1
NetR5_2: R5.2 U1.57 | length 17.4
  Top Side w0.3: U1.57 39.039,60.25 41.453,57.836 51.892,57.836 53.137,59.08 53.412,59.08 R5.2
NetR6_2: R6.2 U1.56 | length 16
  Top Side w0.3: U1.56 38.777,59.75 41.377,57.15 R6.2@52.4,57.15
NetR19_2: R19.2 S1.1 | length 2.3
  Top Side w0.254: R19.2 31.166,48.094 S1.1
NetR20_2: R20.2 S2.1 | length 4
  Top Side w0.3: R20.2 35.599,48.271 36.279,47.591 36.313,47.591 37.643,46.261 S2.1
NetTP5_1: TP5.1 U1.55 | length 13.6
  Top Side w0.3: U1.55 38.565,59.25 42.951,54.864 TP5.1
nRST: H6.1 R19.1 U1.39 | length 37.5
  Top Side w0.3: v1(29.007,48.666) 29.96,49.62 R19.1 31.14,50.927 31.369,51.156 31.369,53.321 31.25,53.44 U1.39 ; v1(50.952,44.374) 56.185,44.374 H6.1
  Bottom Side w0.3: v1(29.007,48.666) 33.299,44.374 v1(50.952,44.374)
PA11: H3.3 U1.28 | length 41.6
  Top Side w0.3: v1(23.368,52.248) 23.48,52.36 24.308,52.36 28.326,56.378 28.326,57.45 27.526,58.25 U1.28
  Bottom Side w0.3: v1(23.368,52.248) 23.368,64.567 22.733,65.202 22.733,68.478 30.886,76.632 H3.3
PA23: U1.15
PA31: U1.52
PB2: H3.1 U1.5 | length 15.8
  Top Side w0.3: U1.5 33.75,66.56 33.997,66.808 33.997,71.005 v1(35.408,72.415)
  Bottom Side w0.3: v1(35.408,72.415) 35.408,77.851 36.22,78.664 36.22,79.985 H3.1
PB3: H3.2 U1.6 | length 14.9
  Top Side w0.3: U1.6 33.25,66.966 33.464,67.18 33.464,70.823 33.274,71.014 v1(33.274,72.517)
  Bottom Side w0.3: v1(33.274,72.517) 33.35,72.593 33.35,80.162 H3.2
RF_CE: U1.20 U6.3 | length 30
  Top Side w0.2: U6.3 5.086,59.938 5.613,59.411 12.078,59.411 15.355,62.687 24.46,62.687 24.897,62.25 U1.20
SCK: U1.21 U6.5 | length 23.5
  Top Side w0.3: U6.5 7.629,66 7.798,65.831 7.798,65.583 9.754,63.627 v1(9.474,63.627) ; v1(22.386,61.705) 26.43,61.705 U1.21
  Bottom Side w0.3: v1(9.474,63.627) 10.846,63.627 12.421,65.202 17.475,65.202 20.972,61.705 v1(22.386,61.705)
SCL: R8.1 U1.36 U5.23 | length 34.5
  Top Side w0.2: v1@36.715,36.31 38.29,34.735 U5.23
  Top Side w0.3: v1(27.813,38.43) 27.813,49.729 29.75,51.666 U1.36 ; v1(36.424,36.703) 36.436,36.715 R8.1 R8.1@37.934,36.728
  Bottom Side w0.3: v1(27.813,38.43) 29.54,36.703 v1(36.424,36.703)
SDA: R7.1 U1.43 U5.24 | length 30.2
  Top Side w0.3: U1.43 33.25,48.563 35.255,46.558 35.255,36.347 37.267,34.335 U5.24@41.93,34.335 ; R7.1 40.894,32.107 40.894,33.299 U5.24@41.93,34.335 ; U5.24 U5.24@41.93,34.335
"SLEEP BUTTON": R20.1 U1.44 | length 5.6
  Top Side w0.3: U1.44 33.75,49.32 R20.1
SP_EN: Q2.1 U1.42 | length 23.9
  Top Side w0.3: U1.42 32.75,32.409 33.487,31.671 Q2.1
STATUS0: R16.2 U1.48 | length 3
  Top Side w0.3: U1.48 36.704,53.521 37.325,53.521 37.975,52.871 R16.2
STATUS1: R21.2 U1.47 | length 2.8
  Top Side w0.3: U1.47@35.275,54.475 35.275,53.219 35.636,52.857 36.69,52.857 R21.2
SW: R13.1 U1.3 VR1.8 VR1.9 | length 19.6
  Top Side w0.3: U1.3 34.75,67.129 R13.1 36.147,68.532 36.147,69.167 37.287,70.307 37.287,71.349 38.669,72.73 VR1.8
  Bottom Side w0.3: VR1.8 VR1.9
SWCLK: H6.2 U1.53 | length 29.9
  Top Side w0.3: U1.53 38.651,58.25 44.348,52.553 44.348,50.713 44.348,49.225 47.066,46.507 56.591,46.507 H6.2
SWDIO: H6.4 U1.51 | length 30.7
  Top Side w0.3: U1.51 37.527,57.252 38.735,57.252 43.688,52.299 43.688,48.616 49.983,42.321 58.238,42.321 H6.4
USB_DETECT: R11.1 R12.2 U1.35 | length 34.1
  Top Side w0.3: v1(28.346,51.638) 29.25,52.542 U1.35 ; v1(52.375,51.46) 53.453,52.539 R12.2 54.42,52.705 R11.1
  Bottom Side w0.3: v1(28.346,51.638) 29.616,51.638 32.918,54.94 43.332,54.94 46.812,51.46 v1(52.375,51.46)
VBUS: H5.1 R11.2 TP18.1 | length 6.9
  Top Side w0.3: TP18.1 57.392,50.558 R11.2 57.392,55.182 58.299,56.089 H5.1
X: U1.10 VR1.2 | length 39.2
  Top Side w0.3: U1.10 31.25,73.465 32.639,74.854 37.44,74.854 38.686,76.1 VR1.2
Y: U1.13 VR1.5 | length 29.8
  Top Side w0.3: U1.13 29.75,64.37 29.401,64.021 29.401,63.042 30.758,61.684 35.47,61.684 36.45,62.664 36.45,64.949 37.109,65.608 50.967,65.608 VR1.5
pads on no net: D1.2 H5.4 H6.3 H6.9 H6.10 U1.4 U1.11 U1.14 U1.16 U1.23 U1.25 U1.26 U1.33 U1.37 U1.40 U1.41 U1.49 U1.50 U1.59 U1.63 U2.6 U5.2 U5.3 U5.4 U5.5 U5.6 U5.7 U5.14 U5.15 U5.16 U5.17 U5.19 U5.21 VR1.11 VR1.12 VR1.13 VR1.14 Y1.2 Y1.4
copper on no net:
  other v3: 44.993,35.335

## Polygon pours and split planes (outlines as drawn)
GND on Top Side "Top Side-No Net1" (solid, pour order 1): 0,85 64,85 64,0 0,0 0,85
GND on Bottom Side "Top Side-No Net" (solid, pour order 0): 0,85 64,85 64,0 0,0 0,85
3V3 on Power Plane (split plane): 63.49,27.834 63.476,27.831 63.434,27.803 63.406,27.761 63.396,27.711 63.396,18.748 52.784,18.748 42.535,28.997 42.493,29.025 42.443,29.035 26.368,29.035 19.624,35.779 19.582,35.807 19.533,35.817 18.542,35.817 18.492,35.807 18.45,35.779 15.326,32.654 12.367,29.695 10.188,29.695 9.375,30.508 9.375,33.401 9.365,33.451 9.337,33.493 7.051,35.779 7.009,35.807 6.96,35.817 0.51,35.817 0.51,65.583 18.898,65.583 26.594,73.279 26.594,84.49 63.49,84.49
5V on Power Plane (split plane): 21.6,32.801 26.782,27.62 26.824,27.592 26.873,27.582 41.863,27.582 51.223,18.222 51.265,18.194 51.314,18.184 63.49,18.184 63.49,0.51 0.51,0.51 0.51,34.694 6.957,34.694 8.507,33.144 8.507,30.048 8.516,29.999 8.544,29.957 9.129,29.372 9.662,28.839 9.704,28.811 9.754,28.801 12.675,28.801 12.724,28.811 12.766,28.839 18.621,34.694 19.708,34.694